# EAGLE board power-supply (EAGLE 9.1.1)
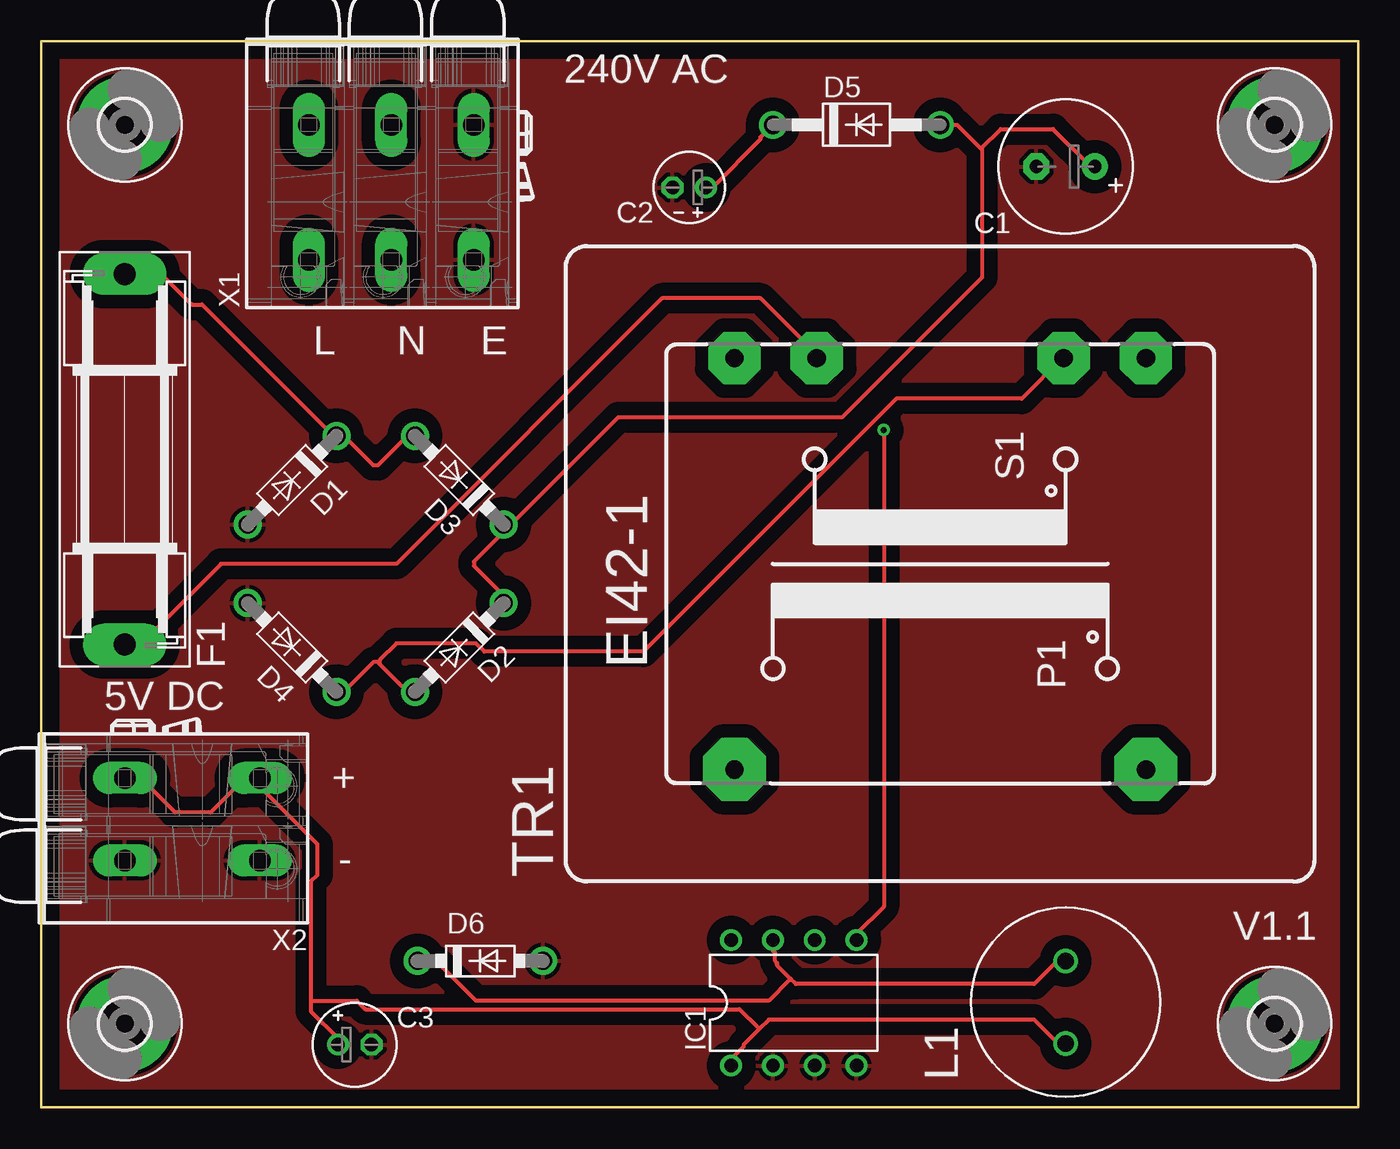
[diagram p0: board, top side]
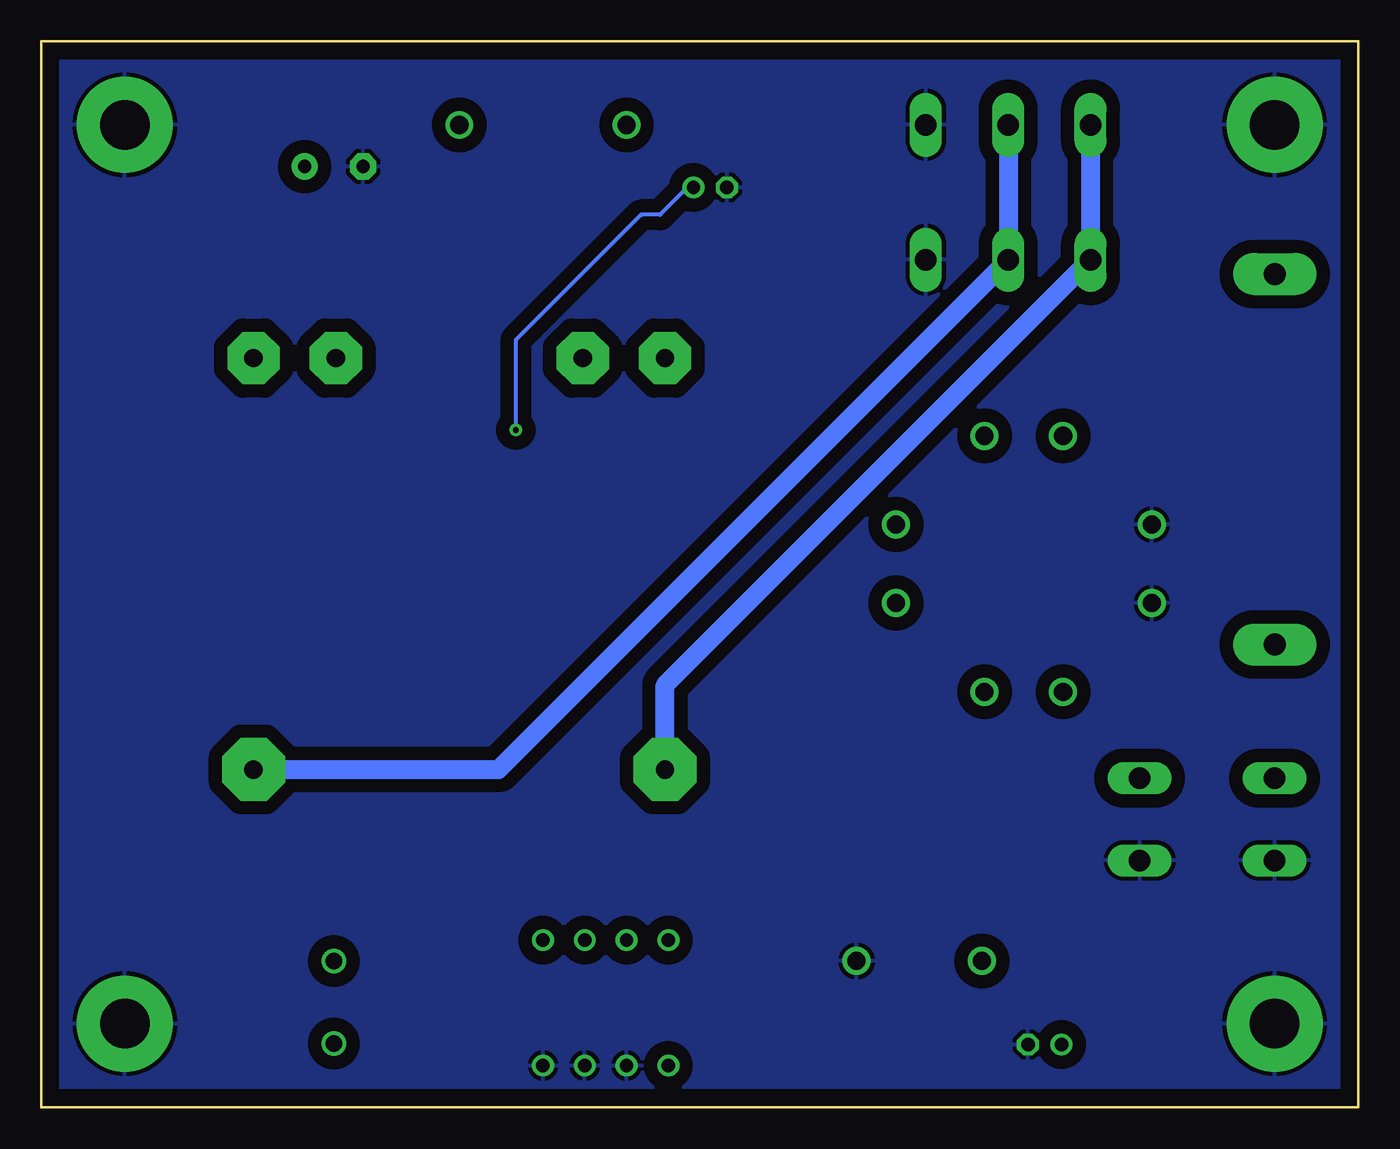
[diagram p1: board, bottom side, seen from below]

Size 80.01 x 64.77 mm. Coordinates in mm from the lower left corner, seen from the top.
Outline: 0,0 80.01,0 80.01,64.77 0,64.77 0,0
Copper layers (1*16): Top 0.035mm / dielectric 1.5mm / Bottom 0.035mm
Design rules "default": minimum track width 6mil, minimum drill 0.35mm, track to track 6mil, track to pad 6mil, pad to pad 6mil, via to via 6mil, smd to smd 6mil, copper to edge 40mil, drill to drill 6mil, minimum pad ring 10mil, minimum via ring 8mil, stop-mask expansion 4mil, vias tented up to drill 0mil, thermal gap 10mil
Net classes: 0 default: width 0.254 mm, clearance 0.254 mm; 1 240V: width 1.143 mm, clearance 0.762 mm

## Footprints (pad centres in the part's own frame; a part is rotated, then mirrored left to right if it is on the bottom)
E3,5-8 = drill 0.813 pad 1.6: + -1.778,0 | drill 0.813 pad 1.6 octagon: - 1.778,0
E2-4 = drill 0.813 pad 1.27: + -1.016,0 | drill 0.813 pad 1.27 octagon: - 1.016,0
E2-5 = drill 0.813 pad 1.27: + -1.016,0 | drill 0.813 pad 1.27 octagon: - 1.016,0
DO41-7.6 = drill 1.1 pad 1.7: A 3.81,0; C -3.81,0
DO41-10 = drill 1.118: A 5.08,0; C -5.08,0
SH22,5 = drill 1.321 pad 2.54 long: 1 -11.252,0; 2 11.252,0
3,0-PAD = drill 3 pad 5.842: B3,0 0,0
DIL08 = drill 0.813 pad 1.27: 1 -3.81,-3.81; 2 -1.27,-3.81; 3 1.27,-3.81; 4 3.81,-3.81; 5 3.81,3.81; 6 1.27,3.81; 7 -1.27,3.81; 8 -3.81,3.81
IND_ELC11D = drill 0.991: 1 -5.004,0; 2 0,0
EI42-1 = drill 1.118 pad 3.81 octagon: 1 -12.497,12.497; 5 -12.497,-12.497 | drill 1.118 pad 3.175 octagon: 6 12.497,-12.497; 7 12.497,-7.493; 9 12.497,7.493; 10 12.497,12.497
P-2604-1103 = drill 1.3 pad 1.93 long: P1.1 0,-2.3; P1.2 -8.2,-2.3; P2.1 0,-7.3; P2.2 -8.2,-7.3; P3.1 0,-12.3; P3.2 -8.2,-12.3
P-2604-1102 = drill 1.3 pad 1.93 long: P1.1 0,-2.3; P1.2 -8.2,-2.3; P2.1 0,-7.3; P2.2 -8.2,-7.3

## Placement (x,y rotation side)
C1  470u  [E3,5-8]  62.23,57.15 180 top
C2  22u  [E2-4]  39.37,55.88 180 top
C3  220u  [E2-5]  19.05,3.81 0 top
D1  1N5817-B  [DO41-7.6]  15.24,38.1 225 top
D2  1N5817-B  [DO41-7.6]  25.4,27.94 225 top
D3  1N5817-B  [DO41-7.6]  25.4,38.1 135 top
D4  1N5817-B  [DO41-7.6]  15.24,27.94 135 top
D5  1N4004  [DO41-10]  49.53,59.69 0 top
D6  1N5819-B  [DO41-7.6]  26.67,8.89 0 top
F1  400mA  [SH22,5]  5.08,39.37 90 top
H1  MOUNT-PAD-ROUND3.0  [3,0-PAD]  5.08,5.08 0 top
H2  MOUNT-PAD-ROUND3.0  [3,0-PAD]  74.93,5.08 0 top
H3  MOUNT-PAD-ROUND3.0  [3,0-PAD]  74.93,59.69 0 top
H4  MOUNT-PAD-ROUND3.0  [3,0-PAD]  5.08,59.69 0 top
IC1  LM2574N-5.0  [DIL08]  45.72,6.35 0 top
L1  330UH  [IND_ELC11D]  62.23,8.89 90 top
TR1  44231  [EI42-1]  54.61,33.02 90 top
X1  2604-1103  [P-2604-1103]  13.97,59.69 90 top
X2  [P-2604-1102]  5.08,12.7 180 top

## Library data of the parts
C1-C3 = rcl; SPICEPREFIX: C
D1-D6 = diode
F1 = fuse; MF: SCHURTER; MPN: 0031.8201; OC_FARNELL: 1162740; OC_NEWARK: 96F8317
H1-H4 = holes
IC1 = linear
L1 = Panasonic-ELC; CURRENTRATING: 1.0A; MPN: ELC11D331F; OC_FARNELL: 1308463; OC_NEWARK: unknown; PACKAGE: Radial Lead-TH; SUPPLIER: PANASONIC
TR1 = trafo
X1 X2 = con-wago_2604

## Nets
5V400MA: C3.+ IC1.1 L1.1 X2.P2.1 X2.P2.2
12VAC: F1.1 TR1.9
240VAC-L [240V]: TR1.1 X1.P1.1 X1.P1.2
240VAC-N [240V]: TR1.5 X1.P2.1 X1.P2.2
GND: C1.- C2.- C3.- D1.A D4.A D6.A H1.B3,0 H2.B3,0 H3.B3,0 H4.B3,0 IC1.2 IC1.3 IC1.4 X1.P3.1 X1.P3.2 X2.P1.1 X2.P1.2
N$1: C2.+ D5.C IC1.5
N$3: C1.+ D2.C D3.C D5.A
N$4: D1.C D3.A F1.2
N$5: D2.A D4.C TR1.7
N$6: D6.C IC1.7 L1.2

## Tracks (layer width: path | path; a pad name or v marks a point on that pad's centre or on a via)
5V400MA
  Top 0.254: IC1.1 41.91,2.92 42.67,3.68 42.67,3.81 43.62,4.76 | 43.62,4.76 44.2,5.33 60.33,5.33 61.72,3.94 62.23,3.94 L1.1 | C3.+ 18.03,4.19 16.38,5.84 16.38,6.48 | 16.38,6.48 16.38,13.72 16.76,14.1 16.76,16 13.34,19.43 13.34,19.94 X2.P2.2 13.34,19.3 11.68,19.3 10.29,17.91 8.13,17.91 6.1,19.94 5.08,19.94 X2.P2.1 | 16.38,6.48 19.18,6.48 19.68,5.97 42.42,5.97 43.56,4.83 43.62,4.76
12VAC
  Top 0.254: F1.1 5.08,28.19 6.1,28.19 10.92,33.02 21.59,33.02 37.72,49.15 43.69,49.15 47.12,45.72 47.12,45.59 TR1.9
240VAC-L
  Bottom 1.143: TR1.1 42.11,25.65 X1.P1.2 X1.P1.1
240VAC-N
  Bottom 1.143: TR1.5 52.24,20.52 X1.P2.2 X1.P2.1
GND
  pour Top (isolate 0.813): 0,0 80.01,0 80.01,64.77 0,64.77
  pour Bottom (isolate 0.813): 0,0 0,64.77 80.01,64.77 80.01,0
N$1  (via drill 0.35)
  Top 0.254: C2.+ 40.77,55.88 43.69,58.8 43.69,58.93 D5.C | IC1.5 49.53,10.54 51.18,12.19 v51.18,41.15
  Bottom 0.254: v51.18,41.15 51.18,46.61 43.56,54.23 42.42,54.23 40.77,55.88 C2.+
N$3
  Top 0.254: D2.C 28.07,30.73 28.07,31.11 26.29,32.89 26.29,33.15 28.07,34.92 28.07,35.31 D3.C 28.19,35.43 28.57,35.43 35.05,41.91 48.64,41.91 57.15,50.42 57.15,58.29 | C1.+ 63.75,57.15 61.47,59.44 58.29,59.44 57.15,58.29 | 57.15,58.29 57.02,58.29 55.63,59.69 D5.A
N$4
  Top 0.254: D3.A 22.61,40.77 22.23,40.77 20.45,38.99 20.19,38.99 18.41,40.77 18.03,40.77 D1.C 17.91,40.89 17.65,40.89 9.78,48.77 9.14,48.77 7.37,50.55 5.08,50.55 F1.2
N$5
  Top 0.254: 20.51,26.99 22.23,25.27 22.61,25.27 D2.A | 20.51,26.99 20.45,27.05 20.19,27.05 18.41,25.27 18.03,25.27 D4.C | 20.51,26.99 20.57,27.05 20.57,27.18 21.59,28.19 26.42,28.19 26.92,27.69 36.58,27.69 51.94,43.05 59.56,43.05 62.1,45.59 TR1.7
N$6
  Top 0.254: IC1.7 44.45,9.53 44.58,9.4 44.58,8.89 44.7,8.76 44.7,8.64 45.53,7.81 | 45.53,7.81 45.85,7.49 60.33,7.49 61.72,8.89 L1.2 | D6.C 24,8.89 26.42,6.48 44.2,6.48 45.47,7.75 45.53,7.81

## Text on the board
tPlace: 240V AC | L | N | E | 5V DC | + | - | V1.1